# EAGLE board Custom_DUE (EAGLE 7.1.0)

Size 100 x 80 mm. Coordinates in mm from the lower left corner, seen from the top.
Outline: 0,0 100,0 100,80 0,80 0,0
Copper layers (1*16): Top 0.035mm / dielectric 1.5mm / Bottom 0.035mm
Design rules "default": minimum track width 10mil, minimum drill 24mil, track to track 8mil, track to pad 8mil, pad to pad 8mil, via to via 8mil, smd to smd 8mil, copper to edge 40mil, drill to drill 8mil, minimum pad ring 10mil, minimum via ring 8mil, stop-mask expansion 4mil, vias tented up to drill 0mil, thermal gap 10mil
Net classes: 1 USB: width 0.203 mm, drill 0.406 mm, clearance 0.203 mm; 3 usbvcc: width 0.203 mm, drill 0.406 mm, clearance 0.203 mm; 4 USBpair: width 0.254 mm, drill 0.406 mm, clearance 0.61 mm

## Footprints (pad centres in the part's own frame; a part is rotated, then mirrored left to right if it is on the bottom)
P1-20 = drill 2.007 pad 3.15 octagon: TP 0,0
J0402 = smd 0.7 x 0.9: 1 -0.65,0; 2 0.65,0; 3 1.95,0
SMC_B = smd 1.6 x 2.4: + -1.5,0; - 1.5,0
C0402 = smd 0.508 x 0.762: 1 -0.445,0; 2 0.445,0
153CLV-0405 = smd 2 x 0.8: + 1.8,0; - -1.8,0
MINIMELF = smd 1.4 x 1.8: A 1.7,0; C -1.7,0
L1812 = smd 1.9 x 3.4: 1 -1.95,0; 2 1.95,0
FIDUCIA-MOUNT = smd 1.016 x 1.016: P$1 0,0
MSOP08 = smd 0.3 x 1.2: 1 -0.976,-2.113; 2 -0.326,-2.113; 3 0.324,-2.113; 4 0.974,-2.113; 5 0.974,2.112; 6 0.324,2.112; 7 -0.326,2.112; 8 -0.976,2.112
SOT223 = smd 1.219 x 2.235: 1 -2.311,-3.099; 2 0,-3.099; 3 2.311,-3.099 | smd 3.6 x 2.2: 4 0,3.099
MLF32 = smd 0.7 x 0.28: 1 -2.45,1.75; 2 -2.45,1.25; 3 -2.45,0.75; 4 -2.45,0.25; 5 -2.45,-0.25; 6 -2.45,-0.75; 7 -2.45,-1.25; 8 -2.45,-1.75; 17 2.45,-1.75; 18 2.45,-1.25; 19 2.45,-0.75; 20 2.45,-0.25; 21 2.45,0.25; 22 2.45,0.75; 23 2.45,1.25; 24 2.45,1.75 | smd 0.28 x 0.7: 9 -1.75,-2.45; 10 -1.25,-2.45; 11 -0.75,-2.45; 12 -0.25,-2.45; 13 0.25,-2.45; 14 0.75,-2.45; 15 1.25,-2.45; 16 1.75,-2.45; 25 1.75,2.45; 26 1.25,2.45; 27 0.75,2.45; 28 0.25,2.45; 29 -0.25,2.45; 30 -0.75,2.45; 31 -1.25,2.45; 32 -1.75,2.45 | smd 3.254 x 3.254: 33 0,0
SC70-5 = smd 0.4 x 0.7: 1 -0.65,-0.85; 2 0,-0.85; 3 0.65,-0.85; 4 0.65,0.85; 5 -0.65,0.85
2X03 = drill 0.95 pad 1.55 octagon: 1 -2.54,-1.27; 2 -2.54,1.27; 3 0,-1.27; 4 0,1.27; 5 2.54,-1.27; 6 2.54,1.27
CON2_USB_MICRO_B_AT = smd 0.406 x 1.346: P1 -1.321,2.692; P2 -0.66,2.692; P3 0,2.692; P4 0.66,2.692; P5 1.321,2.692 | drill 0.8 pad 1.27: P$1 -2.616,2.692 | drill 0.8 pad 1.245: P$2 -2.362,2.692; P$7 2.362,2.692; P$8 2.616,2.692 | drill 0.8 pad 1.143: P$3 -3.505,-0.254; P$4 -3.505,0.254; P$5 3.505,0.254; P$6 3.505,-0.254 | smd 1.778 x 1.651: S1 -3.302,0; S2 3.302,0 | smd 1.524 x 1.27: S3 -2.489,2.692; S4 2.489,2.692 | smd 1.626 x 1.524: S5 -1.016,0; S6 1.016,0
R0402 = smd 0.508 x 0.762: 1 -0.445,0; 2 0.445,0
0805 = smd 1.2 x 1: 1 -1.1,0; 2 1.1,0
R0603-ROUND = smd 0.898 x 1.1: 1 -0.889,0; 2 0.889,0
CHIP-LED0805 = smd 1.2 x 1.2: A 0,-1.05; C 0,1.05
LQFP144 = smd 0.3 x 1.2: 1 -8.75,-10.8; 2 -8.25,-10.8; 3 -7.75,-10.8; 4 -7.25,-10.8; 5 -6.75,-10.8; 6 -6.25,-10.8; 7 -5.75,-10.8; 8 -5.25,-10.8; 9 -4.75,-10.8; 10 -4.25,-10.8; 11 -3.75,-10.8; 12 -3.25,-10.8; 13 -2.75,-10.8; 14 -2.25,-10.8; 15 -1.75,-10.8; 16 -1.25,-10.8; 17 -0.75,-10.8; 18 -0.25,-10.8; 19 0.25,-10.8; 20 0.75,-10.8; 21 1.25,-10.8; 22 1.75,-10.8; 23 2.25,-10.8; 24 2.75,-10.8; 25 3.25,-10.8; 26 3.75,-10.8; 27 4.25,-10.8; 28 4.75,-10.8; 29 5.25,-10.8; 30 5.75,-10.8; 31 6.25,-10.8; 32 6.75,-10.8; 33 7.25,-10.8; 34 7.75,-10.8; 35 8.25,-10.8; 36 8.75,-10.8; 73 8.75,10.8; 74 8.25,10.8; 75 7.75,10.8; 76 7.25,10.8; 77 6.75,10.8; 78 6.25,10.8; 79 5.75,10.8; 80 5.25,10.8; 81 4.75,10.8; 82 4.25,10.8; 83 3.75,10.8; 84 3.25,10.8; 85 2.75,10.8; 86 2.25,10.8; 87 1.75,10.8; 88 1.25,10.8; 89 0.75,10.8; 90 0.25,10.8; 91 -0.25,10.8; 92 -0.75,10.8; 93 -1.25,10.8; 94 -1.75,10.8; 95 -2.25,10.8; 96 -2.75,10.8; 97 -3.25,10.8; 98 -3.75,10.8; 99 -4.25,10.8; 100 -4.75,10.8; 101 -5.25,10.8; 102 -5.75,10.8; 103 -6.25,10.8; 104 -6.75,10.8; 105 -7.25,10.8; 106 -7.75,10.8; 107 -8.25,10.8; 108 -8.75,10.8 | smd 1.2 x 0.3: 37 10.8,-8.75; 38 10.8,-8.25; 39 10.8,-7.75; 40 10.8,-7.25; 41 10.8,-6.75; 42 10.8,-6.25; 43 10.8,-5.75; 44 10.8,-5.25; 45 10.8,-4.75; 46 10.8,-4.25; 47 10.8,-3.75; 48 10.8,-3.25; 49 10.8,-2.75; 50 10.8,-2.25; 51 10.8,-1.75; 52 10.8,-1.25; 53 10.8,-0.75; 54 10.8,-0.25; 55 10.8,0.25; 56 10.8,0.75; 57 10.8,1.25; 58 10.8,1.75; 59 10.8,2.25; 60 10.8,2.75; 61 10.8,3.25; 62 10.8,3.75; 63 10.8,4.25; 64 10.8,4.75; 65 10.8,5.25; 66 10.8,5.75; 67 10.8,6.25; 68 10.8,6.75; 69 10.8,7.25; 70 10.8,7.75; 71 10.8,8.25; 72 10.8,8.75; 109 -10.8,8.75; 110 -10.8,8.25; 111 -10.8,7.75; 112 -10.8,7.25; 113 -10.8,6.75; 114 -10.8,6.25; 115 -10.8,5.75; 116 -10.8,5.25; 117 -10.8,4.75; 118 -10.8,4.25; 119 -10.8,3.75; 120 -10.8,3.25; 121 -10.8,2.75; 122 -10.8,2.25; 123 -10.8,1.75; 124 -10.8,1.25; 125 -10.8,0.75; 126 -10.8,0.25; 127 -10.8,-0.25; 128 -10.8,-0.75; 129 -10.8,-1.25; 130 -10.8,-1.75; 131 -10.8,-2.25; 132 -10.8,-2.75; 133 -10.8,-3.25; 134 -10.8,-3.75; 135 -10.8,-4.25; 136 -10.8,-4.75; 137 -10.8,-5.25; 138 -10.8,-5.75; 139 -10.8,-6.25; 140 -10.8,-6.75; 141 -10.8,-7.25; 142 -10.8,-7.75; 143 -10.8,-8.25; 144 -10.8,-8.75
DPAK = smd 1.31 x 4: 1 -2.28,-4.04; 2 -0.58,-4.04; 3 1.12,-4.04; 4 2.82,-4.04; 5 4.52,-4.04 | smd 8.5 x 10: 6 1.15,5.97
SOIC8 = smd 0.5 x 2.2: 1 -1.905,-3.154; 2 -0.645,-3.154; 3 0.625,-3.154; 4 1.895,-3.154; 5 1.905,3.154; 6 0.635,3.154; 7 -0.635,3.154; 8 -1.905,3.154
FE05-2 = drill 0.914: 1 -5.08,1.27 | drill 0.914 octagon: 2 -5.08,-1.27; 3 -2.54,1.27; 4 -2.54,-1.27; 5 0,1.27; 6 0,-1.27; 7 2.54,1.27; 8 2.54,-1.27; 9 5.08,1.27; 10 5.08,-1.27
CRYSTAL-3.2-2.5 = smd 1.3 x 1.05: 1 -1.15,-0.925; 2 1.15,-0.925; 3 1.15,0.925; 4 -1.15,0.925
RESONATOR_EPSON_FC_145 = smd 1.1 x 1.8: P$1 -1.55,0; P$2 1.55,0
CT/CN0603 = smd 1 x 1: 1 -1,0; 2 1,0

## Placement (x,y rotation side)
+12V_IN  TPPAD1-20  [P1-20]  -27.94,63.5 0 top  (outside the outline)
BR1  NM  [J0402]  -16.51,91.44 0 top  (outside the outline)
C1  10u  [SMC_B]  -38.1,49.53 0 top  (outside the outline)
C2  10u  [SMC_B]  -43.18,49.53 0 top  (outside the outline)
C3  10u  [SMC_B]  -48.26,49.53 0 top  (outside the outline)
C4  100n  [C0402]  -69.85,76.2 0 top  (outside the outline)
C5  100n  [C0402]  -74.93,76.2 0 top  (outside the outline)
C6  100n  [C0402]  -80.01,76.2 0 top  (outside the outline)
C7  100n  [C0402]  -85.09,76.2 0 top  (outside the outline)
C8  100n  [C0402]  -17.78,81.28 0 top  (outside the outline)
C9  100n  [C0402]  -22.86,81.28 0 top  (outside the outline)
C10  100n  [C0402]  -27.94,81.28 0 top  (outside the outline)
C11  10u  [SMC_B]  -53.34,49.53 0 top  (outside the outline)
C12  100n  [C0402]  -33.02,81.28 0 top  (outside the outline)
C13  100n  [C0402]  -38.1,81.28 0 top  (outside the outline)
C14  100n  [C0402]  -43.18,81.28 0 top  (outside the outline)
C15  100n  [C0402]  -48.26,81.28 0 top  (outside the outline)
C16  100n  [C0402]  -53.34,81.28 0 top  (outside the outline)
C17  100n  [C0402]  -58.42,81.28 0 top  (outside the outline)
C18  100n  [C0402]  -63.5,81.28 0 top  (outside the outline)
C19  100n  [C0402]  -68.58,81.28 0 top  (outside the outline)
C20  10u  [153CLV-0405]  -67.31,5.08 0 top  (outside the outline)
C21  22p  [C0402]  -33.02,86.36 0 top  (outside the outline)
C22  22p  [C0402]  -38.1,86.36 0 top  (outside the outline)
C23  22pF_NM  [C0402]  -54.61,76.2 0 top  (outside the outline)
C24  22pF_NM  [C0402]  -64.77,76.2 0 top  (outside the outline)
C25  22p  [C0402]  -43.18,86.36 0 top  (outside the outline)
C26  10u  [153CLV-0405]  -20.32,29.21 0 top  (outside the outline)
C28  100n  [C0402]  -73.66,81.28 0 top  (outside the outline)
C29  10u  [SMC_B]  -58.42,49.53 0 top  (outside the outline)
C30  100n  [C0402]  -78.74,81.28 0 top  (outside the outline)
C32  100n  [C0402]  -83.82,81.28 0 top  (outside the outline)
C33  10u  [SMC_B]  -63.5,49.53 0 top  (outside the outline)
C34  100n  [C0402]  -17.78,86.36 0 top  (outside the outline)
C36  100n  [C0402]  -22.86,86.36 0 top  (outside the outline)
C37  100n  [C0402]  -27.94,86.36 0 top  (outside the outline)
C38  1u  [C0402]  -48.26,86.36 0 top  (outside the outline)
C39  22p  [C0402]  -53.34,86.36 0 top  (outside the outline)
C40  22p  [C0402]  -58.42,86.36 0 top  (outside the outline)
CANH_0  TPPAD1-20  [P1-20]  -77.47,57.15 0 top  (outside the outline)
CANH_1  TPPAD1-20  [P1-20]  -19.05,63.5 0 top  (outside the outline)
CANL_0  TPPAD1-20  [P1-20]  -36.83,63.5 0 top  (outside the outline)
CANL_1  TPPAD1-20  [P1-20]  -45.72,63.5 0 top  (outside the outline)
D2  CD1206-S01575  [MINIMELF]  -68.58,58.42 0 top  (outside the outline)
F2  MF-MSMF050-2 500mA  [L1812]  -31.75,50.8 0 top  (outside the outline)
FID1  FIDUCIALMOUNT  [FIDUCIA-MOUNT]  -50.8,91.44 0 top  (outside the outline)
FID2  FIDUCIALMOUNT  [FIDUCIA-MOUNT]  -54.61,91.44 0 top  (outside the outline)
FID3  FIDUCIALMOUNT  [FIDUCIA-MOUNT]  -58.42,91.44 0 top  (outside the outline)
FID4  FIDUCIALMOUNT  [FIDUCIA-MOUNT]  -62.23,91.44 0 top  (outside the outline)
GND_IN  TPPAD1-20  [P1-20]  -54.61,63.5 0 top  (outside the outline)
IC1  LMV358IDGKR  [MSOP08]  -55.88,3.81 0 top  (outside the outline)
IC4  NCP1117ST33T3G -3V3  [SOT223]  -30.48,41.91 0 top  (outside the outline)
IC6  ATMEGA16U2-MU  [MLF32]  -64.77,39.37 0 top  (outside the outline)
IC10  74LVC1G125DCK  [SC70-5]  -41.91,58.42 0 top  (outside the outline)
ICSP1  3x2M  [2X03]  -66.04,29.21 0 top  (outside the outline)
J3  USB-MICRO B  [CON2_USB_MICRO_B_AT]  -55.88,41.91 0 top  (outside the outline)
JR1  0R  [R0402]  -31.75,76.2 0 top  (outside the outline)
L1  MH2029-300Y  [0805]  -22.86,91.44 0 top  (outside the outline)
L2  MH2029-300Y  [0805]  -30.48,91.44 0 top  (outside the outline)
L3  MH2029-300Y  [0805]  -38.1,91.44 0 top  (outside the outline)
L5  MH2029-300Y  [0805]  -45.72,91.44 0 top  (outside the outline)
R1  1K  [R0402]  -40.64,76.2 0 top  (outside the outline)
R2  3.5K  [R0402]  -38.1,71.12 0 top  (outside the outline)
R3  50  [R0402]  -44.45,76.2 0 top  (outside the outline)
R4  100K  [R0402]  -33.02,71.12 0 top  (outside the outline)
R5  39R 1%  [R0402]  -77.47,64.77 0 top  (outside the outline)
R6  39R 1%  [R0402]  -85.09,64.77 0 top  (outside the outline)
R7  6k8 1%  [R0603-ROUND]  -68.58,64.77 0 top  (outside the outline)
R8  0R_NM  [R0402]  -26.67,71.12 0 top  (outside the outline)
R9  1M_NM  [R0402]  -19.05,71.12 0 top  (outside the outline)
R10  50  [R0402]  -43.18,71.12 0 top  (outside the outline)
R11  120  [R0402]  -36.83,76.2 0 top  (outside the outline)
R12  120  [R0402]  -48.26,71.12 0 top  (outside the outline)
R13  10K  [R0402]  -53.34,71.12 0 top  (outside the outline)
R14  1K  [R0402]  -58.42,71.12 0 top  (outside the outline)
R15  1K  [R0402]  -63.5,71.12 0 top  (outside the outline)
R16  50  [R0402]  -68.58,71.12 0 top  (outside the outline)
R18  10K  [R0402]  -73.66,71.12 0 top  (outside the outline)
R19  22R  [R0402]  -78.74,71.12 0 top  (outside the outline)
R20  22R  [R0402]  -83.82,71.12 0 top  (outside the outline)
R21  1K  [R0402]  -16.51,76.2 0 top  (outside the outline)
R22  50  [R0402]  -21.59,76.2 0 top  (outside the outline)
R23  1K  [R0402]  -26.67,76.2 0 top  (outside the outline)
RES  TPPAD1-20  [P1-20]  -59.69,63.5 0 top  (outside the outline)
RX1  YELLOW  [CHIP-LED0805]  -38.1,39.37 0 top  (outside the outline)
TX1  YELLOW  [CHIP-LED0805]  -44.45,39.37 0 top  (outside the outline)
U1  ATSAM3X8EA-AU  [LQFP144]  -25.4,12.7 0 top  (outside the outline)
U$1  TLF1963TBATMA1  [DPAK]  -45.72,6.35 0 top  (outside the outline)
U$2  MCP2551  [SOIC8]  -33.02,29.21 0 top  (outside the outline)
U$3  LCD_DISPLAY  [FE05-2]  -54.61,30.48 0 top  (outside the outline)
U$4  MCP2551  [SOIC8]  -43.18,29.21 0 top  (outside the outline)
Y1  12MHz KX-7 20pF  [CRYSTAL-3.2-2.5]  -80.01,49.53 0 top  (outside the outline)
Y2  32.768Khz  [RESONATOR_EPSON_FC_145]  -52.07,58.42 0 top  (outside the outline)
Y4  16MHz KX-7 20pF  [CRYSTAL-3.2-2.5]  -26.67,58.42 0 top  (outside the outline)
Z3  CG0603MLC-05E  [CT/CN0603]  -71.12,86.36 0 top  (outside the outline)
Z4  CG0603MLC-05E  [CT/CN0603]  -83.82,86.36 0 top  (outside the outline)

## Library data of the parts
+12V_IN CANH_0 CANH_1 CANL_0 CANL_1 GND_IN RES = testpad
BR1 = bibaja
C1-C3 C11 C29 C33 F2 = rcl
C4-C10 C12-C19 C21-C25 C28 C30 C32 C34 C36-C40 FID1-FID4 IC6 ICSP1 J3 JR1 R3-R16 R18-R23 U1 Y1 Y4 = SmartPrj
C20 C26 = Dash parts; EEE-FPV100UAR: 10u
D2 = diode
IC1 IC4 = linear
IC10 = 74xx-little-us
L1-L3 L5 = wuerth-elektronik
R1 = SmartPrj; SMD: 1K, 1%
R2 = SmartPrj; SMD: 3.5K, 1%
RX1 TX1 = led
U$1-U$4 = Dash parts
Y2 = Arduino_Wifi_shield_v018_tG
Z3 Z4 = varistor

## Nets
8PB4: IC6.18
8PB5: IC6.19
8PB6: IC6.20
16U2-TX: IC6.9 IC10.1 IC10.2
+3V3: BR1.3 C1.+ C4.2 C5.2 C6.2 C7.2 C8.2 C18.2 C29.+ C37.1 IC4.2 IC4.4 IC10.5 JR1.1 L1.1 L2.1 R4.2 U1.11 U1.52 U1.57 U1.62 U1.105 U1.125
+5V: C20.+ C30.2 C36.1 D2.C IC1.8 IC4.3 IC6.4 IC6.32 ICSP1.2 R2.2 R10.2 R13.2 R14.1 R15.1 R22.2 U$1.4 U$2.3 U$3.1 U$3.10 U$4.3
AD0: U1.78
AD1: U1.79
AD2: U1.80
AD3: U1.81
AD4: U1.82
AD5: U1.83
AD6: U1.84
AD7: U1.85
AD8: U1.88
AD9: U1.89
AD10: U1.90
AD11(TXD3): U1.91
AD14(RXD3): U1.92
AREF: BR1.1
AVREF: C19.2 L3.2 U1.75
AVREFL: BR1.2 C34.2 JR1.2 L3.1
BD+ [USB]: J3.P3 R20.2 Z4.2
BD- [USB]: J3.P2 R19.2 Z3.2
CANRX0: U1.24 U$4.4
CANTX0: U1.23 U$4.1
CANTX1/IO: U1.140 U$2.1
D+ [USBpair]: R6.1 U1.37
D- [USBpair]: R5.1 U1.38
DAC0(CANRX1): U1.76 U$2.4
DAC1: U1.77
DTR: IC6.13 R18.1
EEXTINT: U1.25
EMDC: U1.123
EMDIO: U1.127
ERASE_CMD: IC6.23
ERASE_S: U1.130
ERX_DV: U1.119
ERX_ER: U1.122
ERXD0: U1.120
ERXD1: U1.121
ETX_CLK: U1.113
ETX_EN: U1.114
ETXD0: U1.115
ETXD1: U1.118
GND: C1.- C2.- C3.- C4.1 C5.1 C6.1 C7.1 C8.1 C9.1 C10.1 C11.- C12.1 C13.1 C14.1 C15.1 C16.1 C17.1 C18.1 C19.1 C20.- C21.2 C22.2 C23.2 C24.2 C25.2 C26.- C28.2 C29.- C30.1 C32.1 C33.- C34.1 C36.2 C37.2 C38.2 C39.2 C40.2 GND_IN.TP IC1.4 IC4.1 IC6.3 IC6.28 IC6.33 IC10.3 ICSP1.6 J3.P5 J3.P$1 J3.P$2 J3.P$3 J3.P$4 J3.P$5 J3.P$6 J3.P$7 J3.P$8 J3.S1 J3.S2 J3.S3 J3.S4 J3.S5 J3.S6 R1.1 R3.1 R7.1 R8.1 R16.1 R18.2 U1.12 U1.33 U1.44 U1.46 U1.54 U1.58 U1.74 U1.106 U1.126 U$1.3 U$1.6 U$2.2 U$2.8 U$3.4 U$3.7 U$4.2 U$4.8 Y1.2 Y1.4 Y4.2 Y4.4 Z3.1 Z4.1
JTAG_TCK: U1.28
JTAG_TDI: U1.29
JTAG_TDO: U1.30
JTAG_TMS: U1.31
MASTER-RESET: R23.2 U1.47
MISO: U1.108
MISO2: IC6.17 ICSP1.1
MOSI: U1.109
MOSI2: IC6.16 ICSP1.4
N$1: IC6.26 R21.1
N$2: +12V_IN.TP C26.+ U$1.1 U$1.2
N$3: R3.2 R10.1 U$2.5
N$4: R15.2 RX1.A
N$5: R8.2 U1.51
N$6: R1.2 R2.1 U$1.5
N$7: R4.1 U1.53
N$8: R16.2 R22.1 U$4.5
N$9: CANH_0.TP R11.2 U$4.7
N$10: CANL_0.TP R11.1 U$4.6
N$11: R5.2 U1.43
N$12: R6.2 U1.42
N$13: CANH_1.TP R12.2 U$2.7
N$14: R14.2 TX1.A
N$15: CANL_1.TP R12.1 U$2.6
N$16: RES.TP U$3.2 U$3.9
PIN22: U1.1
PIN23: U1.7
PIN24: U1.8
PIN25: U1.13
PIN26: U1.14
PIN27: U1.15
PIN28: U1.16
PIN29: U1.19
PIN30: U1.22
PIN31: U1.26
PIN32: U1.32
PIN33: U1.55
PIN34: U1.59
PIN35: U1.60
PIN36: U1.116
PIN37: U1.63
PIN38: U1.64
PIN39: U1.65
PIN40: U1.66
PIN41: U1.67
PIN42: U1.71
PIN43: U1.72
PIN44: U1.101
PIN45: U1.100
PIN46: U1.99
PIN47: U1.98
PIN48: U1.97
PIN49: U1.96
PIN50: U1.95
PIN51: U1.94
PWM2: U1.144
PWM3: U1.139
PWM5: U1.136
PWM6: U1.135
PWM7: U1.134
PWM8: U1.133
PWM9: U1.132
PWM11: U1.20
PWM12: U1.21
PWM13: U1.68
RD+: IC6.29 R20.1
RD-: IC6.30 R19.1
RESET2: D2.A IC6.24 ICSP1.5 R13.1
RESET_CMD: IC6.22 R23.1
RX: IC10.4 U1.27 U$3.5 U$3.6
RXD0: U1.18
RXD1: U1.5
RXD2: U1.3
RXL: U1.103
RXL-U2: IC6.10 RX1.C
SCK2: IC6.15 ICSP1.3
SCL0-3: U1.87
SCL1: U1.70
SDA0-3: U1.86
SDA1: U1.9
SPCK: U1.110
SS0/PWM10: U1.102 U1.111
SS1/PWM4: U1.112 U1.137
SS3: U1.142
TX: IC6.8 U1.2 U$3.3 U$3.8
TXD0: U1.17
TXD1: U1.6
TXD2: U1.4
TXL: U1.107
TXL-U2: IC6.11 TX1.C
UOTGID: U1.129
UOTGVBOF: U1.128
USBVCC: R21.2
USBVCCU2: C28.1 F2.1 IC6.31
VBG: C25.1 R7.2 U1.40
VDDANA: C3.+ C10.2 L1.2 U1.73
VDDOUT: C11.+ C12.2 C13.2 C14.2 C15.2 C16.2 C17.2 L5.1 U1.10 U1.45 U1.56 U1.61 U1.104 U1.124
VDDOUTMI: C2.+ C9.2 L2.2 U1.41
VDDPLL: C32.2 C33.+ L5.2 U1.34
VUCAP: C38.1 IC6.27
XIN: C22.1 U1.36 Y1.1
XIN32: C24.1 U1.48 Y2.P$2
XOUT: C21.1 U1.35 Y1.3
XOUT32: C23.1 U1.49 Y2.P$1
XT1: C39.1 IC6.1 R9.1 Y4.1
XT2: C40.1 IC6.2 R9.2 Y4.3
XUSB [usbvcc]: U1.39
XVCC [usbvcc]: F2.2 J3.P1

## Tracks (layer width: path | path; a pad name or v marks a point on that pad's centre or on a via)
16U2-TX  (2 unrouted)
+3V3  (22 unrouted)
+5V  (19 unrouted)
AVREF  (2 unrouted)
AVREFL  (3 unrouted)
BD+  (2 unrouted)
BD-  (2 unrouted)
CANRX0  (1 unrouted)
CANTX0  (1 unrouted)
CANTX1/IO  (1 unrouted)
D+  (1 unrouted)
D-  (1 unrouted)
DAC0(CANRX1)  (1 unrouted)
DTR  (1 unrouted)
GND  (88 unrouted)
MASTER-RESET  (1 unrouted)
MISO2  (1 unrouted)
MOSI2  (1 unrouted)
N$1  (1 unrouted)
N$2  (3 unrouted)
N$3  (2 unrouted)
N$4  (1 unrouted)
N$5  (1 unrouted)
N$6  (2 unrouted)
N$7  (1 unrouted)
N$8  (2 unrouted)
N$9  (2 unrouted)
N$10  (2 unrouted)
N$11  (1 unrouted)
N$12  (1 unrouted)
N$13  (2 unrouted)
N$14  (1 unrouted)
N$15  (2 unrouted)
N$16  (2 unrouted)
RD+  (1 unrouted)
RD-  (1 unrouted)
RESET2  (3 unrouted)
RESET_CMD  (1 unrouted)
RX  (3 unrouted)
RXL-U2  (1 unrouted)
SCK2  (1 unrouted)
SS0/PWM10  (1 unrouted)
SS1/PWM4  (1 unrouted)
TX  (3 unrouted)
TXL-U2  (1 unrouted)
USBVCCU2  (2 unrouted)
VBG  (2 unrouted)
VDDANA  (3 unrouted)
VDDOUT  (13 unrouted)
VDDOUTMI  (3 unrouted)
VDDPLL  (3 unrouted)
VUCAP  (1 unrouted)
XIN  (2 unrouted)
XIN32  (2 unrouted)
XOUT  (2 unrouted)
XOUT32  (2 unrouted)
XT1  (3 unrouted)
XT2  (3 unrouted)
XVCC  (1 unrouted)
(copper drawn outside any net)
  shapes: Bottom area x2